# Altium PCB PCB_Stellaris.PcbDoc (part 2 of 3)
Units mm, origin at the board's own origin, x right, y up, seen from the top; angles counter-clockwise.
Board outline 50.8 x 63.5 mm, 6 copper layers (L1, L2 (GND), L3, L4, L5 (VCC), L6), stack 1.551 mm thick; 95 components, 90 nets, 373 pads, 126 vias.
Unrouted connection lines stored in the file: 1.
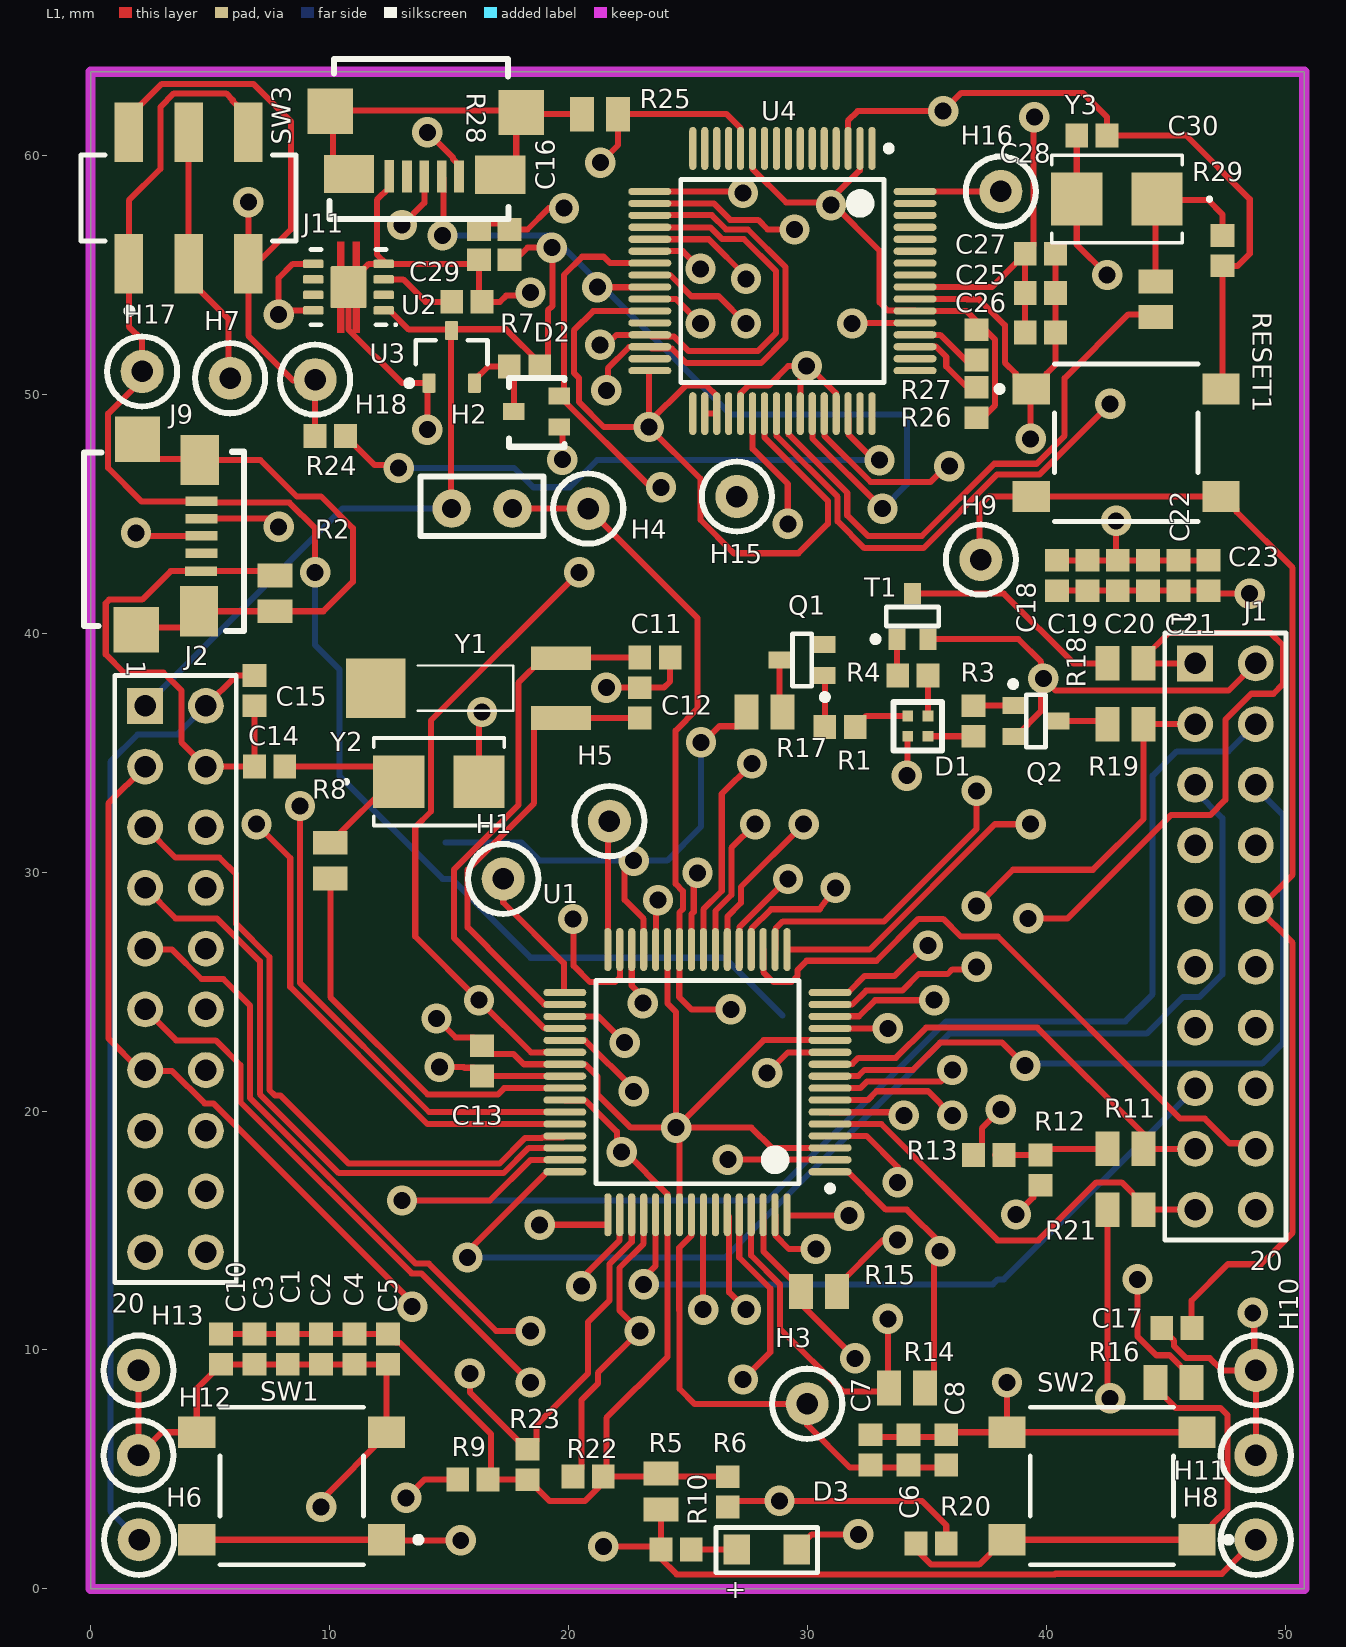
[diagram p0: L1 view]

## Part data (continued)
SW3: "C&k Components JS202011SCQN / Switch Slide DPDT 6VDC 0.3A SMT", Actuator Color=Black, Contact Current Rating=300mA, Contact Resistance=70mR, Flammability Rating="UL94 V-2", Manufacturer="ITT C&K", Max Operating Temperature=85°C, Max Voltage Rating (DC)=6V, Min Operating Temperature=-20°C, Package Quantity=1, Supplier Part Number 1=401-2002-1-ND, Actuator Length=2mm, Actuator Material=Nylon,Polyamide,PA46, Actuator Type=Standard, ComponentLink1Description=https://datasheet.ciiva.com/2889/js-29aug13-2889127.pdf?src-supplier=Digi-Key, ComponentLink1URL=https://datasheet.ciiva.com/2889/js-29aug13-2889127.pdf?src-supplier=Digi-Key, ComponentLink2Description=https://datasheet.ciiva.com/23829/1707718-23829488.pdf?src-supplier=Newark, ComponentLink2URL=https://datasheet.ciiva.com/23829/1707718-23829488.pdf?src-supplier=Newark, ComponentLink3Description=https://datasheet.ciiva.com/8625/js-9dec14-8625470.pdf?src-supplier=Avnet, ComponentLink3URL=https://datasheet.ciiva.com/8625/js-9dec14-8625470.pdf?src-supplier=Avnet, ComponentLink4Description=https://datasheet.ciiva.com/2889/js-15sept15-2889128.pdf?src-supplier=Digi-Key, ComponentLink4URL=https://datasheet.ciiva.com/2889/js-15sept15-2889128.pdf?src-supplier=Digi-Key, ComponentLink5Description=https://datasheet.ciiva.com/2889/js-15sept15-2889129.pdf?src-supplier=Digi-Key, ComponentLink5URL=https://datasheet.ciiva.com/2889/js-15sept15-2889129.pdf?src-supplier=Digi-Key, ComponentLink6Description=https://datasheet.ciiva.com/22630/1707718-22630697.pdf?src-supplier=Element14, ComponentLink6URL=https://datasheet.ciiva.com/22630/1707718-22630697.pdf?src-supplier=Element14, Contact Material="Copper Alloy", Contact Plating=Silver, Current Rating=300mA, Depth=7.5mm, Electrical Life=5000Cycles, Housing Material=Nylon, Lead Free="Lead Free", Length=9mm, Manufacturer Part Number=JS202011SCQN, Max Current Rating=300mA, Mount="Surface Mount", Orientation=Vertical, Packaging="Tape and Reel", Pricing 1="1 = 0.55000, 10 = 0.53000, 25 = 0.51040, 100 = 0.44180, 250 = 0.40252, 500 = 0.37306 (USD)", Radiation Hardening=No, REACH SVHC="No SVHC", RoHS=Yes, Series=JS, Stock 1=102163, Supplier 1=Digi-Key, Switch Function=On-On, Switch Travel=2mm, Termination="Gull Wing", Throw Configuration=DPDT, Voltage Rating (DC)=6V
U1 U4: "MCU 32-bit Stellaris ARM Cortex M4F RISC 256KB Flash 1.2V/3.3V 64-Pin LQFP Tray", Case/Package=LQFP, Manufacturer="Texas Instruments", Max Frequency=80MHz, Max Operating Temperature=85°C, Max Power Dissipation=560mW, Min Operating Temperature=-40°C, ComponentLink1Description=http://www.ti.com/lit/ds/symlink/lm4f120h5qr.pdf?src-supplier=Avnet, ComponentLink1URL=http://www.ti.com/lit/ds/symlink/lm4f120h5qr.pdf?src-supplier=Avnet, Core Architecture=ARM, Data Bus Width=32b, Interface=I2C,USB,CAN,UART, Manufacturer Part Number=LM4F120H5QRFIG, Memory Size=256KB, Memory Type=FLASH, Number of Programmable I/O=43, Number of Timers/Counters=13, Packaging=Tray, Radiation Hardening=No, RAM Size=32KB, RoHS=Yes, RoHS Compliant=Yes, Stock 1=0, Supplier 1="Arrow Electronics", Supplier Part Number 1=LM4F120H5QRFIG, Watchdog Timer=Yes
U2: library part TLV803MDBZR, "3-pin voltage supervisor (reset IC) with active-low and open-drain reset 3-SOT-23 -40 to 125", Case/Package=SOT-23, Manufacturer="Texas Instruments", Max Operating Temperature=125°C, Max Reset Threshold Voltage=4.48V, Max Supply Current=30uA, Max Supply Voltage=6V, Min Operating Temperature=-40°C, Min Reset Threshold Voltage=4.28V, Min Supply Voltage=1.1V, Number of Voltages Monitored=1, Operating Supply Current=20uA, Package Quantity=3000, Quiescent Current=9uA, Supplier Part Number 1=296-29194-1-ND, Threshold Voltage=4.38V, ComponentLink1Description=https://datasheet.ciiva.com/1979/tlv803m-1979835.pdf?src-supplier=Digi-Key, ComponentLink1URL=https://datasheet.ciiva.com/1979/tlv803m-1979835.pdf?src-supplier=Digi-Key, ComponentLink2Description=https://datasheet.ciiva.com/1979/tlv803m-1979836.pdf?src-supplier=Digi-Key, ComponentLink2URL=https://datasheet.ciiva.com/1979/tlv803m-1979836.pdf?src-supplier=Digi-Key, ComponentLink3Description=https://datasheet.ciiva.com/14203/tlv863m-14203541.pdf?src-supplier=Avnet, ComponentLink3URL=https://datasheet.ciiva.com/14203/tlv863m-14203541.pdf?src-supplier=Avnet, Lead Free="Lead Free", Manufacturer Part Number=TLV803MDBZR, Nominal Supply Current=30uA, Number of Elements=1, Number of Pins=3, Packaging="Tape and Reel", Pricing 1="1 = 0.79000, 10 = 0.69600, 25 = 0.65400, 100 = 0.53370, 250 = 0.49572, 500 = 0.42188, 1000 = 0.34825 (USD)", Radiation Hardening=No, REACH SVHC="No SVHC", Reset="Active Low", Reset Timeout=120ms, RoHS=Yes, RoHS Compliant=Yes, Series=TLV803M, Stock 1=0, Supplier 1=Digi-Key, Supply Current=30uA, Watchdog Timer=No
U3: library part TPS73633DRBT, "LDO Regulator Pos 3.3V 0.4A 8-Pin VSON EP T/R", Case/Package=VSON, Dropout Voltage=75mV, Input Bias Current=300uA, Manufacturer="Texas Instruments", Max Input Voltage=5.5V, Max Operating Temperature=125°C, Max Output Current=400mA, Max Output Voltage=3.3V, Max Power Dissipation=2.5W, Min Input Voltage=1.7V, Min Operating Temperature=-40°C, Output Voltage Accuracy=0.5%, Package Quantity=250, Supplier Part Number 1=296-32558-1-ND, Accuracy=1%, ComponentLink1Description=https://datasheet.ciiva.com/15111/getdatasheetpartid-48105-15111075.pdf?src-supplier=Verical, ComponentLink1URL=https://datasheet.ciiva.com/15111/getdatasheetpartid-48105-15111075.pdf?src-supplier=Verical, Lead Free="Lead Free", Manufacturer Part Number=TPS73633DRBT, Min Current Limit=400mA, Min Output Voltage=3.3V, Number of Outputs=1, Number of Pins=8, Number of Regulators=1, Output Current=400mA, Output Type=Fixed, Output Voltage=3.3V, Packaging="Tape and Reel", Polarity=Positive, Power Dissipation=2.5W, Pricing 1="1 = 2.87000, 10 = 2.57600, 25 = 2.43520, 100 = 2.11040 (USD)", Quiescent Current=300uA, Radiation Hardening=No, RoHS=Yes, RoHS Compliant=Yes, Series=-, Stock 1=0, Supplier 1=Digi-Key
Y1: library part AB26TRB-32.768KHZ-T, "Crystal, Cylindrical 32.768Khz, 12.5F, 20Ppm, 2 X 6 Formed Lead Smd Rohs Compliant: Yes", Case/Package=Radial, ESR (Equivalent Series Resistance)=50kR, Frequency=32.768kHz, Frequency Stability=-0.034ppm, Frequency Tolerance=20ppm, Load Capacitance=12.5pF, Manufacturer=Abracon, Max Operating Temperature=85°C, Min Operating Temperature=-40°C, Operating Frequency="32.768 kHz", Package Quantity=500, Supplier Part Number 1=535-9033-1-ND, ComponentLink1Description=https://datasheet.ciiva.com/4945/ab26tr-30941-4945140.pdf?src-supplier=Mouser, ComponentLink1URL=https://datasheet.ciiva.com/4945/ab26tr-30941-4945140.pdf?src-supplier=Mouser, ComponentLink2Description=https://datasheet.ciiva.com/1357/ab26tr-1357201.pdf?src-supplier=Element14, ComponentLink2URL=https://datasheet.ciiva.com/1357/ab26tr-1357201.pdf?src-supplier=Element14, ComponentLink3Description=https://datasheet.ciiva.com/854/ab26trb-854381.pdf?src-supplier=Digi-Key, ComponentLink3URL=https://datasheet.ciiva.com/854/ab26trb-854381.pdf?src-supplier=Digi-Key, ComponentLink4Description=https://datasheet.ciiva.com/854/ab26trb-854382.pdf?src-supplier=Digi-Key, ComponentLink4URL=https://datasheet.ciiva.com/854/ab26trb-854382.pdf?src-supplier=Digi-Key, ComponentLink5Description=https://datasheet.ciiva.com/854/ab26trb-854383.pdf?src-supplier=Digi-Key, ComponentLink5URL=https://datasheet.ciiva.com/854/ab26trb-854383.pdf?src-supplier=Digi-Key, ComponentLink6Description=https://datasheet.ciiva.com/3174/ab26trb-3174233.pdf?src-supplier=Avnet, ComponentLink6URL=https://datasheet.ciiva.com/3174/ab26trb-3174233.pdf?src-supplier=Avnet, ComponentLink7Description=https://datasheet.ciiva.com/16215/ab26trb-16215317.pdf?src-supplier=Future+Electronics, ComponentLink7URL=https://datasheet.ciiva.com/16215/ab26trb-16215317.pdf?src-supplier=Future+Electronics, ComponentLink8Description=https://datasheet.ciiva.com/28508/270658-28508373.pdf?src-supplier=Element14, ComponentLink8URL=https://datasheet.ciiva.com/28508/270658-28508373.pdf?src-supplier=Element14, Depth=1.9mm, Height=0.075inch, Lead Free="Lead Free", Lead Pitch=2.54mm, Length=6mm, Manufacturer Part Number=AB26TRB-32.768KHZ-T, Mount="Surface Mount", Number of Pins=2, Packaging="Tape and Reel", Pricing 1="1 = 0.65000, 10 = 0.57400, 50 = 0.53660, 100 = 0.47420, 500 = 0.44928, 1000 = 0.37440 (USD)", REACH SVHC="No SVHC", RoHS=Yes, Series=AB26TRB, Series Resistance=50kR, Stock 1=61676, Supplier 1=Digi-Key, Termination=Radial, Tolerance=20ppm
Y2 Y3: library part ABM3-16.000MHZ-B2-T, "Crystal 16MHz ±20ppm (Tol) ±50ppm (Stability) 18pF FUND 40Ohm 2-Pin Mini-CSMD T/R", Case/Package=CSMD, ESR (Equivalent Series Resistance)=40R, Frequency Stability=50ppm, Frequency Tolerance=20ppm, Load Capacitance=18pF, Manufacturer=Abracon, Max Operating Temperature=70°C, Min Operating Temperature=-20°C, Operating Frequency="16 MHz", Package Quantity=1000, Resistor Type=Ceramic, Series Resistance=60R, Supplier Part Number 1=13J1720, Accuracy=20ppm, ComponentLink1Description=https://datasheet.ciiva.com/15116/getdatasheetpartid-719852-15116752.pdf?src-supplier=Verical, ComponentLink1URL=https://datasheet.ciiva.com/15116/getdatasheetpartid-719852-15116752.pdf?src-supplier=Verical, ComponentLink2Description=https://datasheet.ciiva.com/855/abm3-855737.pdf?src-supplier=Digi-Key, ComponentLink2URL=https://datasheet.ciiva.com/855/abm3-855737.pdf?src-supplier=Digi-Key, ComponentLink3Description=https://datasheet.ciiva.com/855/abm3-855738.pdf?src-supplier=Digi-Key, ComponentLink3URL=https://datasheet.ciiva.com/855/abm3-855738.pdf?src-supplier=Digi-Key, ComponentLink4Description=https://datasheet.ciiva.com/855/abm3-855739.pdf?src-supplier=Digi-Key, ComponentLink4URL=https://datasheet.ciiva.com/855/abm3-855739.pdf?src-supplier=Digi-Key, ComponentLink5Description=https://datasheet.ciiva.com/4945/abm3-47699-4945240.pdf?src-supplier=Mouser, ComponentLink5URL=https://datasheet.ciiva.com/4945/abm3-47699-4945240.pdf?src-supplier=Mouser, ComponentLink6Description=https://datasheet.ciiva.com/16209/abm3-16209965.pdf?src-supplier=Future+Electronics, ComponentLink6URL=https://datasheet.ciiva.com/16209/abm3-16209965.pdf?src-supplier=Future+Electronics, Depth=3.2mm, Frequency=16MHz, Height=0.051inch, Lead Free="Lead Free", Length=5mm, Manufacturer Part Number=ABM3-16.000MHZ-B2-T, Mount="Surface Mount", Number of Pins=2, Packaging="Tape and Reel", Pricing 1="1 = 0.92700, 10 = 0.88000 (USD)", REACH SVHC=Yes, RoHS=Yes, Series=ABM3, Stock 1=928, Supplier 1=Newark, Termination=SMD/SMT, Tolerance=20ppm, Width=3.2mm

## Via types
v1: diameter 1.27, hole 0.711, L1 to L4, 52 vias
v2: diameter 1.27, hole 0.711, L1 to L3, 39 vias
v3: diameter 1.27, hole 0.711, L1 to L2 (GND), 14 vias
v4: diameter 1.27, hole 0.711, L3 to L6, 12 vias
v5: diameter 1.27, hole 0.711, L1 to L5 (VCC), 6 vias
v6: diameter 1.27, hole 0.711, L3 to L4, 2 vias
v7: diameter 1.27, hole 0.711, L1 to L6, 1 vias

## Nets (pads, with @x,y where several pads share a name; then routed paths per layer and width w, separated by ;. In a path a pad name is that pad's centre, name@x,y a point inside that pad or via, vN(x,y) a via of type N, cw(c..) or ccw(c..) an arc to the next point about the centre after c; other vN are vias at no path point)
+3.3V: C18.2 C19.2 C20.2 C21.2 C22.2 C23.2 H2.2 H8.1 J2.1 R5.1 R7.2 R10.2 R26.2 R27.2 R28.2 U2.3 U3.1 U4.2 U4.11 U4.26 U4.37 U4.42 U4.45 U4.54 | length 108.7
  L1 w0.254: U3.1@12.545,53.483 13.323,52.705 15.07,52.705 U2.3@15.113,52.662 15.171,52.72 17.384,52.72 18.86,51.244 19.144,51.529 19.144,53.507 19.327,53.69 19.327,56.111 v5(19.304,56.134) 18.288,56.134 17.653,55.499 R28.2@17.526,55.626 ; U2.3@15.052,52.451 15.083,52.42 15.083,46.004 H2.2@15.113,45.974 ; v5(21.463,1.778) 23.749,1.778 R10.2@23.876,1.651 ; U4.26@23.406,53.987 23.415,53.978 24.508,53.978 v5(25.527,52.959) ; R5.1@23.876,3.326 R10.2@23.876,1.651 ; U4.37@27.206,49.187 27.206,50.041 27.529,50.364 28.383,50.364 29.2,51.181 v5(29.972,51.181) ; U4.11@27.706,60.287 27.715,60.278 27.715,59.424 29.106,58.033 30.994,58.033 33.02,56.007 33.02,53.848 33.372,53.496 34.497,53.496 U4.54@34.506,53.487 36.658,53.487 37.262,52.883 37.861,52.284 37.861,49.545 R27.2@37.338,49.022 ; U4.42@29.706,49.187 29.706,50.64 29.972,50.906 v5(29.972,51.181) ; v5@30.924,58.102 32.197,59.375 32.197,60.278 U4.2@32.206,60.287 ; U4.45@31.206,49.187 31.197,49.196 31.197,50.05 30.066,51.181 v5(29.972,51.181) ; C18.2@40.457,41.778 C19.2@41.724,41.778 C20.2@42.991,41.778 C21.2@44.258,41.778 C22.2@45.525,41.778 ; C22.2@45.525,41.518 45.395,41.648 C22.2@45.525,41.778 ; v5(48.514,41.656) 46.914,41.656 C23.2@46.792,41.778 C22.2@45.525,41.778 ; H8.1@48.768,2.057 47.346,0.635 40.386,0.635 40.363,0.612 24.534,0.612 23.876,1.27 R10.2@23.876,1.651
  L6 w0.254: J2.1@2.286,36.957 10.541,45.212 H2.2@15.113,45.212
  other v5: 30.988,57.912
+ICDI_VBUS: H18.1 J11.1 R24.2 SW3.3 SW3.4 | length 38.1
  L1 w0.254: SW3.4@1.604,60.96 1.604,61.61 2.986,62.992 6.814,62.992 8.382,61.424 8.382,56.896 6.946,55.46 SW3.3@6.604,55.46 ; v1(6.604,58.039) SW3.3@6.604,55.46 ; R24.2@9.398,48.26 9.398,50.571 8.484,50.571 6.604,52.451 SW3.3@6.604,55.46 ; v1(14.097,60.96) 14.116,60.96 15.172,59.904 15.172,59.838 15.42,59.589 J11.1@15.42,59.114
  L4 w0.254: v1(6.604,58.039) 9.525,60.96 v1(14.097,60.96)
+MCU_PWR: C1.2 C2.2 C3.2 C4.2 C5.2 C10.2 H2.1 H4.1 R5.2 R6.1 R9.2 R22.2 R23.2 U1.2 U1.11 U1.26 U1.37 U1.42 U1.54 | length 97.9
  L1 w0.254: C10.2@5.461,10.668 C3.2@6.858,10.668 C1.2@8.255,10.668 C2.2@9.652,10.668 C4.2@11.049,10.668 C5.2@12.446,10.668 12.794,10.32 12.921,10.32 16.764,6.477 16.764,4.699 R9.2@16.637,4.572 16.764,4.572 R23.2@18.288,4.572 18.313,4.572 19.202,3.683 20.701,3.683 21.463,4.445 R22.2@21.463,4.699 ; H2.1@17.818,44.704 18.326,45.212 20.066,45.212 H4.1@20.828,45.974 ; U1.42@19.85,20.459 19.859,20.45 20.713,20.45 22.031,19.132 22.031,18.482 v1(22.225,18.288) 22.375,18.288 24.141,16.522 24.141,15.668 U1.54@24.15,15.659 24.15,9.718 21.59,7.158 21.59,4.826 R22.2@21.463,4.699 ; U1.37@19.85,22.959 19.859,22.95 20.713,22.95 22.733,20.93 v1(22.733,20.828) ; H4.1@20.828,45.212 25.4,40.64 25.4,36.83 24.488,35.918 24.488,29.507 24.788,29.207 24.788,28.451 24.65,28.313 U1.26@24.65,26.759 24.65,25.45 24.638,25.438 24.638,24.769 25.15,24.257 v1@26.706,24.257 ; R6.1@26.67,4.699 24.003,4.699 R5.2@23.876,4.826 23.749,4.699 21.59,4.699 R22.2@21.463,4.699 ; v1(26.67,17.968) 30.941,17.968 U1.2@30.95,17.959 ; v1(28.321,21.59) 29.19,22.459 U1.11@30.95,22.459
  L4 w0.254: v1(22.733,20.828) 25.593,17.968 v1(26.67,17.968) 28.321,19.619 v1(28.321,21.59) 28.321,22.642 v1@26.706,24.257
  other v1: 26.797,24.257
+MCU_VDDC: C6.1 C7.1 C8.1 H3.1 U1.25 U1.56 | length 48.2
  L1 w0.254: U1.56@25.15,15.659 25.141,15.65 25.141,14.783 24.638,14.28 24.638,11.655 24.65,11.643 24.65,8.37 25.273,7.747 H3.1@29.993,7.747 29.993,6.872 31.785,5.08 C8.1@35.814,5.08 ; U1.25@25.15,26.759 25.15,28.242 25.246,28.338 25.246,29.818 v2(25.4,29.972)
  L3 w0.254: v2(25.4,29.972) 25.4,16.256 29.972,11.684 H3.1@29.972,8.128 ; H3.1@29.422,7.683 H3.1@29.866,8.128
+USB_VBUS: H17.1 J9.1 R13.2 SW3.1 SW3.6 | length 78.8
  L1 w0.254: SW3.6@6.604,60.96 6.604,61.61 5.951,62.263 5.951,62.311 5.674,62.588 3.49,62.588 2.921,62.019 2.921,59.428 1.604,58.111 SW3.1@1.604,55.46 1.604,52.832 2.159,52.277 2.159,50.571 2.125,50.571 0.738,49.184 0.738,46.912 2.131,45.519 J9.1@4.64,45.519 4.693,45.466 8.319,45.466 9.398,44.387 v4(9.398,42.545) ; R13.2@36.957,18.161 37.305,18.509 37.305,19.271 v1(38.1,20.066)
  L4 w0.254: v4(28.956,24.003) 30.734,22.225 33.06,22.225 33.346,22.511 34.217,22.511 34.335,22.629 36.553,22.629 38.1,21.082 v1(38.1,20.066)
  L6 w0.254: v4(9.398,42.545) 9.398,39.497 10.414,38.481 10.414,34.032 14.732,29.714 15.117,29.714 18.415,26.416 26.543,26.416 v4(28.956,24.003)
  other v2: 9.398,42.545
+VBUS: C15.2 D1.1 H6.1 H7.1 J2.11 SW3.2 SW3.5 U3.5 U3.8 | length 107.9
  L1 w0.254: SW3.5@4.104,60.96 SW3.2@4.104,55.46 4.104,54.81 5.779,53.136 H7.1@5.779,50.571 ; J2.11@4.826,36.957 6.096,38.227 C15.2@6.858,38.227 C15.2@7.206,38.575 ; v2(7.874,53.34) 7.874,54.864 8.468,55.458 U3.5@9.32,55.458 ; v2@8.277,53.508 U3.8@9.32,53.508 ; v2(34.163,34.036) 34.182,34.055 34.182,35.668 D1.1@34.202,35.687
  L3 w0.254: v2(7.874,53.34) 6.684,52.15 6.684,51.477 4.826,49.619 J2.11@4.826,36.957 6.604,38.735 29.762,38.735 34.163,34.334 v2(34.163,34.036)
  L6 w0.254: H6.1@2.032,2.057 0.83,3.259 0.83,34.612 1.976,35.758 3.627,35.758 J2.11@4.826,36.957
DEBUG_PC0/TCK/SWCLK: R22.1 U1.52 U4.19 U4.30 | length 85.9
  L1 w0.254: R22.1@20.193,4.699 20.541,5.047 20.541,7.904 21.232,8.595 21.232,9.04 v1(22.987,10.795) 22.13,11.652 22.13,13.43 23.15,14.451 U1.52@23.15,15.659 ; v2(21.59,50.165) 21.65,50.225 21.65,51.085 22.543,51.978 23.397,51.978 U4.30@23.406,51.987 23.479,51.914 24.333,51.914 24.939,51.308 28.067,51.308 29.083,52.324 29.083,55.328 27.515,56.896 26.607,56.896 26.007,57.496 23.415,57.496 U4.19@23.406,57.487
  L3 w0.254: v6(12.672,40.41) 16.256,43.995 16.256,45.974 18.254,47.972 19.17,47.972 21.362,50.165 v2(21.59,50.165)
  L4 w0.254: v6(12.672,40.41) 10.31,38.049 10.31,16.686 14.527,12.469 18.963,12.469 20.637,10.795 v1(22.987,10.795)
DEBUG_PC1/TMS/SWDIO: R23.1 U1.51 U4.20 U4.29 | length 84.1
  L1 w0.254: v1(15.875,9.017) 15.875,8.23 18.263,5.842 R23.1@18.288,5.842 18.313,5.842 18.661,6.19 18.661,6.85 20.828,9.017 20.828,11.176 21.717,12.065 21.717,13.589 22.65,14.522 U1.51@22.65,15.659 ; v2(21.321,52.07) 21.596,52.07 22.013,52.487 U4.29@23.406,52.487 23.479,52.414 24.421,52.414 25.019,51.816 27.94,51.816 28.679,52.555 28.679,55.161 27.348,56.492 26.439,56.492 25.944,56.987 U4.20@23.406,56.987
  L3 w0.254: v6(10.668,40.386) 10.668,42.29 15.207,46.829 16.08,46.829 v2(21.321,52.07)
  L4 w0.254: v6(10.668,40.386) 9.906,39.624 9.906,13.716 14.605,9.017 v1(15.875,9.017)